# Altium PCB AlarmTiming.PcbDoc
Units mm, origin at the board's own origin, x right, y up, seen from the top; angles counter-clockwise.
Board outline 89.41 x 71.12 mm, 2 copper layers (Top Layer, Bottom Layer); 29 components, 19 nets, 107 pads, 1 vias.
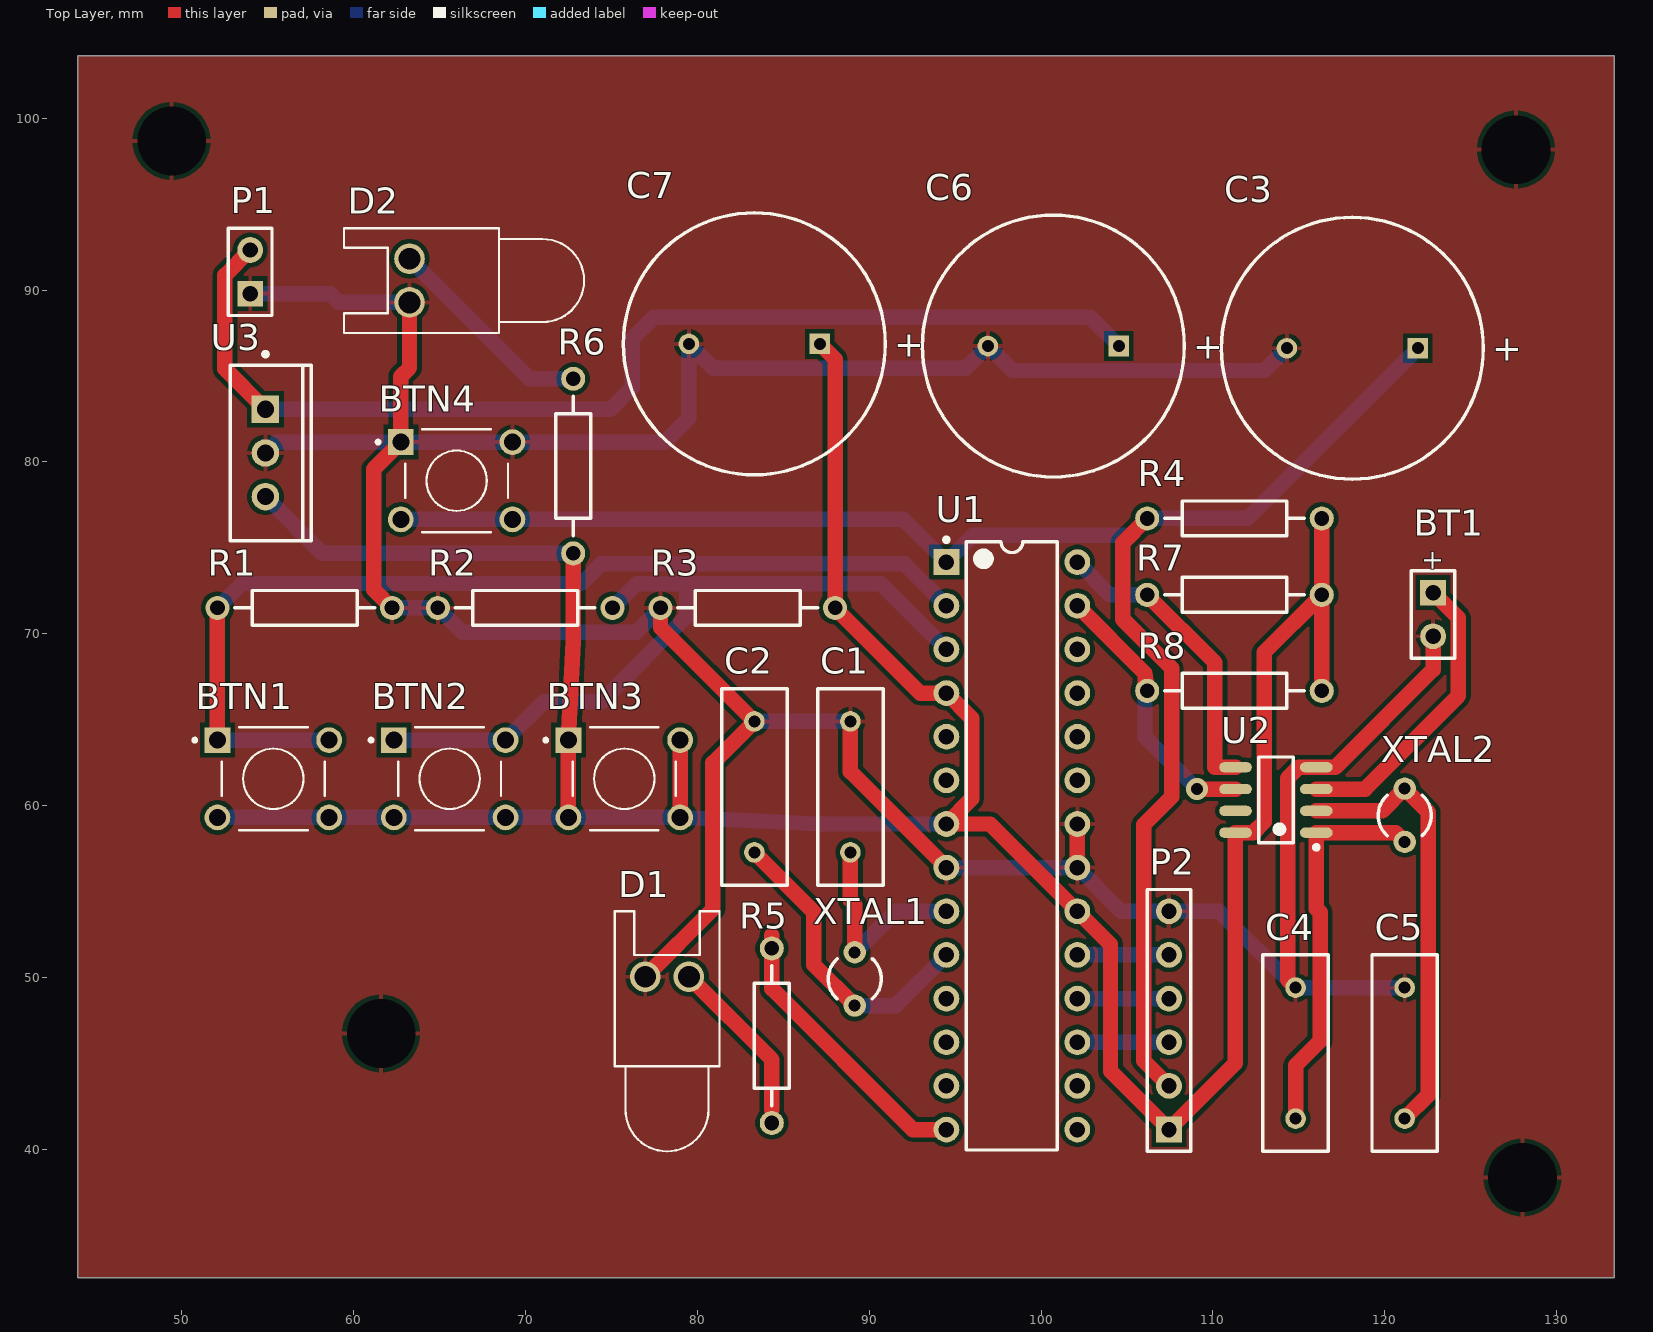
[diagram p0: Top Layer view]
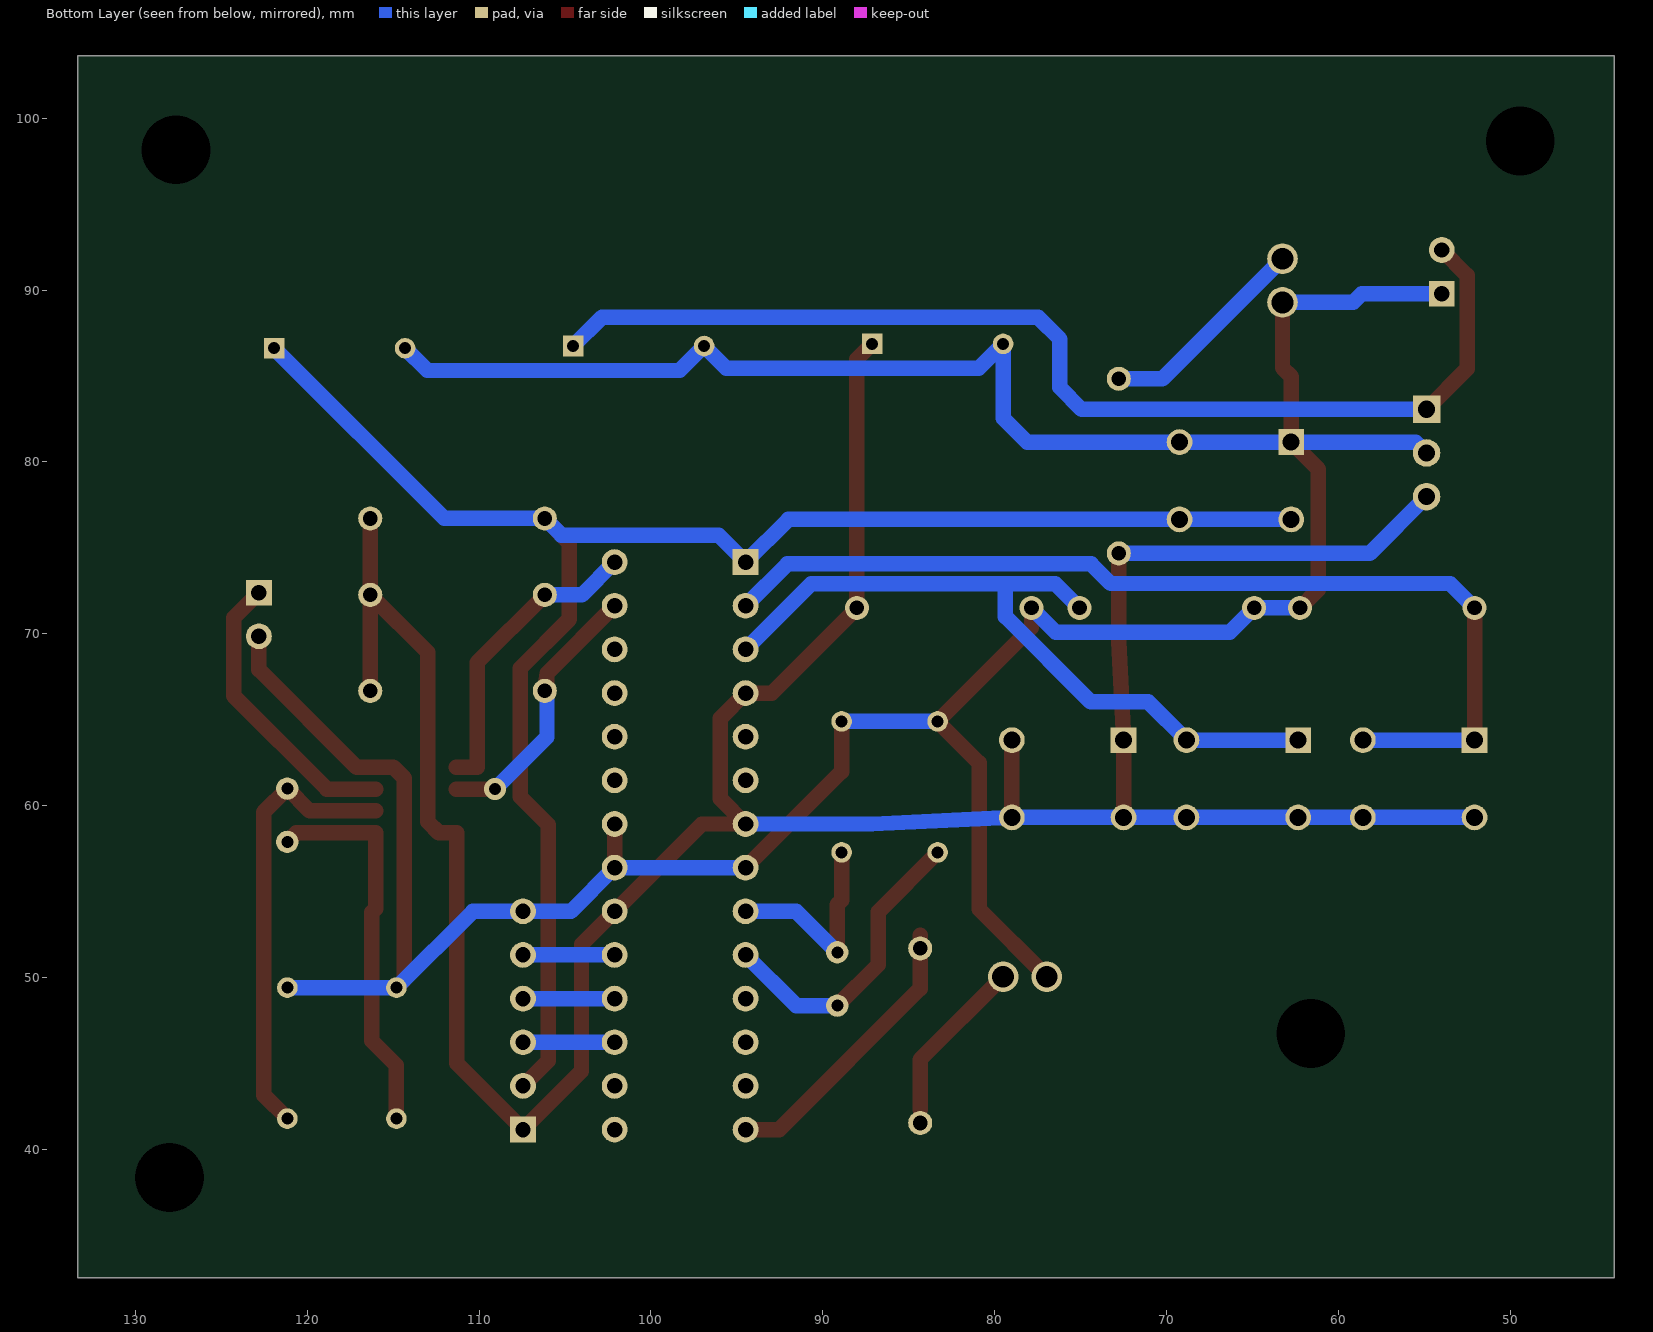
[diagram p1: Bottom Layer view, seen from below]

## Layer stack, top to bottom
Top Solder: solder mask 0.0102, Solder Resist, Dk 3.5
Top Layer: signal copper 0.0356
Dielectric 1: dielectric 0.32, FR-4, Dk 4.8
Bottom Layer: signal copper 0.0356
Bottom Solder: solder mask 0.0102, Solder Resist, Dk 3.5

## Board outline
43.942,32.512 133.35,32.512 133.35,103.632 43.942,103.632

## Design rules (kind name [scope] priority, off if disabled: settings)
Clearance [All] p1: gap=0.254 ignorepadtopadclearanceinfootprint=FALSE except(0: Arc-Hole Track-Hole SMDPad-Hole THPad-Hole Via-Hole Fill-Hole Poly-Hole Region-Hole Text-Hole)
HoleSize [All] p1: absolutevalues=TRUE maxlimit=4.5 minlimit=0.025 maxpercent=80.000 minpercent=20.000
PolygonConnect [All] p1: connectstyle=Relief reliefconductorwidth=0.254 reliefentries=4 polygonreliefangle="90 Angle" airgapwidth=0.254
RoutingVias [All] p1: holewidth=0.711 width=1.27 viastyle="Through Hole" minholewidth=0.711 minwidth=1.27 maxholewidth=0.711 maxwidth=1.27
SilkToSolderMaskClearance [IsPad] p1: minsilkscreentomaskgap=0.215 clearancetoexposedcopper=TRUE
SolderMaskExpansion [All] p1: expansion=0.102 istentingtop=FALSE
Width [All] p1: maxlimit=1.3 minlimit=0.3 preferedwidth=0.9 minimp=50.000000 maximp=50.000000 favimp=50.000000
28 further rules are at their usual default settings.

## Components (designator, comment, footprint, x,y, rotation, side; value= is the part's Value field where it differs from the comment)
BT1 "3V" BAT-2 122.809,71.12 r270 top
BTN1 "1825910-2" TE_1825910-2 52.07,63.809 r0 top
BTN2 "1825910-2" TE_1825910-2 62.334,63.809 r0 top
BTN3 "1825910-2" TE_1825910-2 72.494,63.809 r0 top
BTN4 "1825910-2" TE_1825910-2 62.738,81.153 r0 top
C1 "Cap" RAD-0.3 88.9,61.087 r90 top value=22pF
C2 "Cap" RAD-0.3 83.312,61.087 r90 top value=22pF
C3 "Cap Pol1" RB7.6-15 118.11,86.614 r0 top value=100nF
C4 "Cap" RAD-0.3 114.808,45.593 r90 top value=22pF
C5 "Cap" RAD-0.3 121.158,45.593 r90 top value=22pF
C6 "Cap Pol1" RB7.6-15 100.711,86.741 r0 top value=330nF
C7 "Cap Pol1" RB7.6-15 83.312,86.868 r0 top value=330nF
D1 "LED0" LED-0 78.232,50.038 r0 top
D2 "LED0" LED-0 63.246,90.551 r90 top
P1 "Header 2" HDR1X2 53.975,89.789 r90 top
P2 "Header 6" HDR1X6 107.442,41.148 r90 top
R1 "Res2" AXIAL-0.4 57.15,71.501 r180 top value=4.7K
R2 "Res2" AXIAL-0.4 69.977,71.501 r0 top value=4.7K
R3 "Res2" AXIAL-0.4 82.931,71.501 r0 top value=4.7K
R4 "Res2" AXIAL-0.4 111.252,76.708 r0 top value=10K
R5 "Res2" AXIAL-0.4 84.328,46.609 r90 top value=330Ω
R6 "Res2" AXIAL-0.4 72.771,79.756 r270 top value=330Ω
R7 "Res2" AXIAL-0.4 111.252,72.263 r0 top value=4.7K
R8 "Res2" AXIAL-0.4 111.252,66.675 r0 top value=4.7K
U1 "ATmega328P-PU" 28P3 98.298,57.658 r0 top
U2 "DS1307Z+" S8+2_L 113.665,60.325 r180 top
U3 "LM7805CT" FAIR-TO-220-3 54.864,80.518 r0 top
XTAL1 "16MHz" R38 89.154,49.911 r180 top
XTAL2 "32.768kHz" R38 121.158,59.436 r0 top

## Footprints (in the part's own frame and the unit in brackets; to place one, negate y for a bottom-side part, rotate by r counter-clockwise, add the part's x,y. Pads: shape width x height; smd on the part's side, far side on the other; paste and mask are expansions set on the pad)
28P3 [mm] "28-Pin Plastic Dual In-Line Package (PDIP)"
  rect 1.5x1.5 hole 0.9: 1(-3.81,16.51)
  round 1.5 hole 0.9: 2(-3.81,13.97) 3(-3.81,11.43) 4(-3.81,8.89) 5(-3.81,6.35) 6(-3.81,3.81) 7(-3.81,1.27) 8(-3.81,-1.27) 9(-3.81,-3.81) 10(-3.81,-6.35) 11(-3.81,-8.89) 12(-3.81,-11.43) 13(-3.81,-13.97) 14(-3.81,-16.51) 15(3.81,-16.51) 16(3.81,-13.97) 17(3.81,-11.43) 18(3.81,-8.89) 19(3.81,-6.35) 20(3.81,-3.81) 21(3.81,-1.27) 22(3.81,1.27) 23(3.81,3.81) 24(3.81,6.35) 25(3.81,8.89) 26(3.81,11.43) 27(3.81,13.97) 28(3.81,16.51)
  silkscreen extent -3.93,-17.7 2.65,17.93, body extent -3.6,-17.65 3.6,17.65, height 4.58
AXIAL-0.4 [mm] "Axial Device, Thru-Hole; 2 Leads; 0.4 in Pin Spacing"
  round 1.4 hole 0.85: 1(-5.08,0) 2(5.08,0)
  silkscreen extent -4.06,-1.02 4.06,1.02
BAT-2 [mm] "Battery; 2 Leads"
  rect 1.5x1.5 hole 0.9: 1(-1.27,0)
  round 1.5 hole 0.9: 2(1.27,0)
  silkscreen extent -2.54,-1.27 2.54,1.27
FAIR-TO-220-3 [mm] "FM, 3-Leads, Body 10.2x4.7mm, Pitch 2.54mm"
  rect 1.6x1.6 hole 1: 1(0,2.54)
  round 1.6 hole 1: 2(0,0) 3(0,-2.54)
  silkscreen extent -2.04,-5.1 2.66,5.87, body extent -2.04,-5.1 2.66,5.1, height 18.95
HDR1X2 [mm] "Connector; Header; 2 Position"
  rect 1.5x1.5 hole 0.9: 1(0,0)
  round 1.5 hole 0.9: 2(2.54,0)
  silkscreen extent -1.27,-1.27 3.81,1.27
HDR1X6 [mm] "Connector; Header; 6 Position"
  rect 1.5x1.5 hole 0.9: 1(0,0)
  round 1.5 hole 0.9: 2(2.54,0) 3(5.08,0) 4(7.62,0) 5(10.16,0) 6(12.7,0)
  silkscreen extent -1.27,-1.27 13.97,1.27
LED-0 [mil] "LED; 2 Leads"
  round 70 hole 50: 1(50,0) 2(-50,0)
  silkscreen extent -120,-400 120,150
R38 [mm] "Crystal, Thru-Hole; 2 Leads; Body 3.1 x 8.2 mm (Dia.xH)"
  round 1.3 hole 0.7: 1(0,1.55) 2(0,-1.55)
  silkscreen extent -1.55,-1.19 1.55,1.17
RAD-0.3 [mm] "Radial Cap, Thru-Hole; 2 Leads; 0.3 in Pin Spacing"
  round 1.2 hole 0.7: 1(-3.81,0) 2(3.81,0)
  silkscreen extent -5.71,-1.91 5.71,1.91
RB7.6-15 [mm] "Polarized Capacitor (Radial); 2 Leads"
  rect 1.2x1.2 hole 0.7: 1(3.81,0)
  round 1.2 hole 0.7: 2(-3.81,0)
  silkscreen extent -7.62,-7.62 7.62,7.62
S8+2_L [mm] "SOIC, 8-Leads, Body 4.9x3.9mm, Pitch 1.27mm, IPC High Density"
  oval 1.9x0.6 smd: 1(-2.35,1.905) 2(-2.35,0.635) 3(-2.35,-0.635) 4(-2.35,-1.905) 5(2.35,-1.905) 6(2.35,-0.635) 7(2.35,0.635) 8(2.35,1.905)
  silkscreen extent -2.48,-2.5 1,2.88, body extent -2,-2.5 2,2.5, height 1.75
TE_1825910-2 [mm]
  rect 1.498x1.498 hole 0.99: 1(0,0)
  round 1.498 hole 0.99: 2(6.5,0) 3(0,-4.5) 4(6.5,-4.5)
  silkscreen extent -1.42,-5.24 6.24,0.74

## Part data
BT1: library part Battery, "Multicell Battery", LatestRevisionDate=17-Jul-2002, LatestRevisionNote="Re-released for DXP Platform.", PackageDescription="Battery; 2 Leads", PackageReference=BAT-2, Published=24-Mar-1999, Publisher="Altium Limited"
BTN1 BTN2 BTN3 BTN4: "50 mA SPST Round Actuator 160 Gram Force Tactile Pushbutton Switch", Contact_Current_Rating="50 mA", Package=None, Availability=Unavailable, Configuration_Pole-Throw="Single Pole - Single Throw", EU_RoHS_Compliance=Compliant, MF="TE Connectivity", MP=1825910-2, Price=None, SnapEDA_Link=https://www.snapeda.com/parts/1825910-2/TE%20Connectivity%20ALCOSWITCH%20Switches/view-part/278983/?ref=snap, TE_purchase_URL=https://www.te.com/usa-en/product-1825910-2.html?te_bu=Cor&te_type=disp&te_campaign=seda_glo_cor-seda-global-disp-prtnr-fy19-seda-model-bom-cta_sma-317_1&elqCampaignId=32493
C1 C2 C4 C5: "Capacitor", LatestRevisionDate=17-Jul-2002, LatestRevisionNote="Re-released for DXP Platform.", PackageDescription="Radial Cap, Thru-Hole; 2 Leads; 0.3 in Pin Spacing", PackageReference=RAD-0.3, Published=8-Jun-2000, Publisher="Altium Limited"
C3 C6 C7: "Polarized Capacitor (Radial)", LatestRevisionDate=17-Jul-2002, LatestRevisionNote="Re-released for DXP Platform.", PackageDescription="Polarized Capacitor (Radial); 2 Leads", PackageReference=RB7.6-15, Published=8-Jun-2000, Publisher="Altium Limited"
D1 D2: "Typical INFRARED GaAs LED", LatestRevisionDate=08-Jul-2005, LatestRevisionNote="Mech Layer 1 removed.", PackageDescription="LED; 2 Leads", PackageReference=LED-0, Published=8-Jun-2000, Publisher="Altium Limited"
P1: "Header, 2-Pin", LatestRevisionDate=17-Jul-2002, LatestRevisionNote="Re-released for DXP Platform.", Publisher="Altium Limited"
P2: "Header, 6-Pin", LatestRevisionDate=17-Jul-2002, LatestRevisionNote="Re-released for DXP Platform.", Publisher="Altium Limited"
R1 R2 R3 R4 R5 R6 R7 R8: "Resistor", LatestRevisionDate=17-Jul-2002, LatestRevisionNote="Re-released for DXP Platform.", PackageDescription="Axial Device, Thru-Hole; 2 Leads; 0.4 in Pin Spacing", PackageReference=AXIAL-0.4, Published=8-Jun-2000, Publisher="Altium Limited"
U1: library part CMP-0095-00013-2, "8-bit AVR Microcontroller, 32KB Flash, 1KB EEPROM, 2KB SRAM, 28-pin PDIP, Industrial Grade (-40°C to 85°C)", ComponentLink1Description="Manufacturer URL", ComponentLink1URL=http://www.atmel.com/, ComponentLink2Description="ATmega48A/48PA/88A/88PA/168A/168PA/328/328P Datasheet", ComponentLink2URL=http://www.atmel.com/dyn/resources/prod_documents/8271.pdf, ComponentLink3Description="ATmega48A/48PA/88A/88PA/168A/168PA/328/328P Summary", ComponentLink3URL=http://www.atmel.com/dyn/resources/prod_documents/8271S.pdf, DatasheetVersion="revD, May-2011", PackageDescription="28-lead (0.300\"/7.62mm Wide) Plastic Dual Inline Package (PDIP)", PackageReference=28P3, PackageVersion="revB, Sep-2001", RevisionNote="DatasheetVersion updated. URLs added."
U2: library part CMP-0254-00308-1, "64 x 8, Serial, I2C Real-Time Clock, 5.0V, 8-Pin SO, 0 to 70 degC, Pb-Free", Code_IPC=SOIC127P600-8, Code_JEDEC=MS-012-AA, ComponentLink1Description="Manufacturer URL", ComponentLink1URL=http://www.maxim-ic.com, ComponentLink2Description=Datasheet, ComponentLink2URL=http://datasheets.maxim-ic.com/en/ds/DS1307.pdf, ComponentLink3Description="Package Specification", ComponentLink3URL=http://pdfserv.maxim-ic.com/package_dwgs/21-0041.PDF, DatasheetVersion=10-Feb-2008, PackageDescription="8-Pin Small-Outline IC, Narrow (0.15in), 1.27 mm Pitch, SOIC (N), Pb-Free", PackageReference=S8+2, PackageVersion="revC, 2010"
U3: library part CMP-2000-04938-1, "Positive Voltage Regulator, 5 V, 1 A, -40 to 125 degC, 3-Pin TO-220, RoHS, Tube", Manufacturer=FairchildSemiconductor, Maximum Input Voltage=35V, Maximum Output Current=2.2(Typ)A, Maximum Quiescent Current=8mA, Operating Temperature=-40to125degC, Output Voltage=5V, Package=3TO-220AB, Package Description="3-Pin Through Hole Device, Body 10 x 4.5 mm, Pitch 2.54 mm", Package Reference=TO-220, Typical Dropout Voltage @ Current=2@1AV, Accuracy=±4%, Category=LinearRegulator, Datasheet URL=https://datasheet.ciiva.com/26904/lm7805ct-26904988.pdf, Datasheet Version=Aug-12, Line Regulation=100mV, Load Regulation=100mV, Manufacturer URL=https://www.fairchildsemi.com/, Mounting=ThroughHole, Number of Outputs=1, Output Type=Fixed, Package URL=https://www.fairchildsemi.com/package-drawings/TO/TO220B03.pdf, Packaging=Rail/Tube, Polarity=Positive, Rad Hard=No, Type=Linear
XTAL1 XTAL2: library part XTAL, "Crystal Oscillator", LatestRevisionDate=17-Jul-2002, LatestRevisionNote="Re-released for DXP Platform.", PackageDescription="Crystal, Thru-Hole; 2 Leads; Body 3.1 x 8.2 mm (Dia.xH)", PackageReference=R38, Published=8-Jun-2000, Publisher="Altium Limited"

## Free pads (board coordinates)
  round 1.524 hole 4: 12(127.635,98.171) 14(128.016,38.354) 15(61.595,46.736) 16(49.403,98.679)

## Via types
v1: diameter 1.27, hole 0.711, Top Layer to Bottom Layer, 1 vias

## Nets (pads, with @x,y where several pads share a name; then routed paths per layer and width w, separated by ;. In a path a pad name is that pad's centre, name@x,y a point inside that pad or via, vN(x,y) a via of type N, cw(c..) or ccw(c..) an arc to the next point about the centre after c; other vN are vias at no path point)
+5: BTN1.3 BTN1.4 BTN2.3 BTN2.4 BTN3.1 BTN3.2 BTN3.3 BTN3.4 C7.1 P2.1 R3.2 R4.2 R6.2 R7.2 R8.2 U1.4 U1.7 U1.20 U2.8 U3.3 | length 184.8
  Top Layer w0.9: BTN3.3 BTN3.1 72.771,69.543 R6.2 ; BTN3.4 BTN3.2 ; C7.1 88.011,85.979 R3.2 92.964,66.548 U1.4 95.961,65.075 95.961,60.401 U1.7 97.028,58.928 U1.20 104.038,51.918 104.038,44.552 P2.1 111.303,45.009 111.303,58.42 U2.8 112.344,58.42 112.979,59.055 112.979,68.91 R7.2 ; R8.2 R7.2 ; R4.2 R7.2
  Bottom Layer w0.9: BTN1.3 BTN1.4 BTN2.3 BTN2.4 BTN3.3 BTN3.4 87.122,58.928 U1.7 ; U3.3 58.166,74.676 R6.2
GND: BT1.2 BTN4.1 BTN4.2 C1.2 C2.2 C3.2 C4.2 C5.2 C6.2 C7.2 D1.2 D2.2 P1.1 P2.6 pad.12 pad.14 pad.15 pad.16 R1.1 R2.1 R3.1 U1.8 U1.21 U1.22 U2.4 U3.2 | length 212.5
  Top Layer w0.9: R1.1 61.163,72.568 61.163,79.578 BTN4.1 62.738,84.963 63.246,85.471 D2.2 ; D1.2 80.899,53.975 80.899,62.484 C2.2 77.851,70.358 R3.1 ; C1.2 88.9,61.976 U1.8 ; U1.21 U1.22 ; C4.2 114.351,49.86 114.351,61.595 114.986,62.23 U2.4 117.124,62.23 122.809,67.915 BT1.2
  Bottom Layer w0.9: P1.1 58.623,89.789 59.131,89.281 D2.2 ; U3.2 55.499,81.153 BTN4.1 BTN4.2 78.105,81.153 79.502,82.55 C7.2 80.924,85.446 95.606,85.446 C6.2 98.323,85.319 113.005,85.319 C3.2 ; R1.1 R2.1 66.319,70.079 76.429,70.079 R3.1 ; C2.2 C1.2 ; U1.8 U1.21 104.648,53.848 P2.6 110.363,53.848 C4.2 C5.2
NetBT1_1: BT1.1 U2.3 | length 17.1
  Top Layer w0.9: U2.3 118.851,60.96 124.282,66.391 124.282,70.917 BT1.1
NetBTN1_1: BTN1.1 BTN1.2 R1.2 U1.2 | length 58.7
  Top Layer w0.9: BTN1.1 R1.2
  Bottom Layer w0.9: BTN1.1 BTN1.2 ; R1.2 53.492,72.923 73.244,72.923 74.379,74.059 92.057,74.059 U1.2
NetBTN2_1: BTN2.1 BTN2.2 R2.2 U1.3 | length 43.5
  Bottom Layer w0.9: BTN2.1 BTN2.2 71.065,66.04 74.415,66.04 79.375,71 79.375,72.905 ; R2.2 76.461,72.905 79.375,72.905 ; U1.3 90.671,72.905 79.375,72.905
NetBTN4_3: BTN4.3 BTN4.4 C3.1 P2.2 R4.1 U1.1 | length 101.4
  Top Layer w0.9: R4.1 104.75,75.286 104.75,70.841 107.594,67.996 107.594,60.503 105.969,58.877 105.969,45.161 P2.2
  Bottom Layer w0.9: BTN4.3 BTN4.4 92.003,76.653 U1.1 96.063,75.743 105.207,75.743 R4.1 112.014,76.708 C3.1
NetC1_1: C1.1 U1.9 XTAL1.2 | length 12.2
  Top Layer w0.9: C1.1 88.9,54.483 89.154,54.229 XTAL1.2
  Bottom Layer w0.9: XTAL1.2 91.541,53.848 U1.9
NetC2_1: C2.1 U1.10 XTAL1.1 | length 17.9
  Top Layer w0.9: C2.1 86.766,53.823 86.766,50.749 XTAL1.1
  Bottom Layer w0.9: XTAL1.1 91.541,48.361 U1.10
NetC4_1: C4.1 U2.1 XTAL2.2 | length 22.7
  Top Layer w0.9: C4.1 114.808,44.882 116.23,46.304 116.23,53.785 116.015,54 U2.1 120.624,58.42 XTAL2.2
NetC5_1: C5.1 U2.2 XTAL2.1 | length 26
  Top Layer w0.9: U2.2 119.862,59.69 XTAL2.1 122.53,59.614 122.53,43.155 C5.1
NetC6_1: C6.1 P1.2 U3.1 | length 65.1
  Top Layer w0.9: P1.2 52.502,90.856 52.502,85.42 U3.1
  Bottom Layer w0.9: U3.1 74.93,83.058 76.2,84.328 76.2,87.147 77.47,88.417 102.845,88.417 C6.1
NetD1_1: D1.1 R5.1 | length 9.7
  Top Layer w0.9: D1.1 84.328,45.212 84.328,42.291
NetD2_1: D2.1 R6.1 | length 12.4
  Bottom Layer w0.9: D2.1 70.231,84.836 R6.1
NetP2_3: P2.3 U1.17 | length 5.3
  Bottom Layer w0.9: U1.17 P2.3
NetP2_4: P2.4 U1.18 | length 5.3
  Bottom Layer w0.9: U1.18 P2.4
NetP2_5: P2.5 U1.19 | length 5.3
  Bottom Layer w0.9: U1.19 P2.5
NetR5_2: R5.2 U1.14 | length 16.7
  Top Layer w0.9: 84.328,52.451 84.328,49.352 92.532,41.148 U1.14
NetR7_1: R7.1 U1.28 U2.5 | length 17.7
  Top Layer w0.9: R7.1 110.109,68.326 110.109,62.23 U2.5
  Bottom Layer w0.9: U1.28 104.013,72.263 R7.1
NetR8_1: R8.1 U1.27 U2.6 | length 16.8
  Top Layer w0.9: U1.27 106.045,67.691 ; R8.1@106.045,66.675 106.045,67.691 ; R8.1 106.045,67.691 ; v1(109.068,60.96) U2.6
  Bottom Layer w0.9: R8.1@106.045,66.675 106.045,63.983 v1(109.068,60.96)
pads on no net: U1.5 U1.6 U1.11 U1.12 U1.13 U1.15 U1.16 U1.23 U1.24 U1.25 U1.26 U2.7

## Polygon pours and split planes (outlines as drawn)
GND on Top Layer "GND_L01_P001" (solid, pour order 1): 43.942,103.632 43.942,32.512 133.35,32.512 133.35,103.632

## Text inside footprints (layer, text, board x,y; h text height)
BT1: Top Overlay "+" at 122.301,74.93 h1.15 r270
C3: Top Overlay "+" at 126.242,85.877 h1.5
C6: Top Overlay "+" at 108.843,86.004 h1.5
C7: Top Overlay "+" at 91.444,86.131 h1.5